# Altium PCB FPGA_board — kopia.PcbDoc (part 2 of 2)
Units mm, origin at the board's own origin, x right, y up, seen from the top; angles counter-clockwise.
Board outline 100 x 100 mm, 2 copper layers (Top Layer, Bottom Layer); 241 components, 219 nets, 1214 pads, 210 vias.
Unrouted connection lines stored in the file: 566.
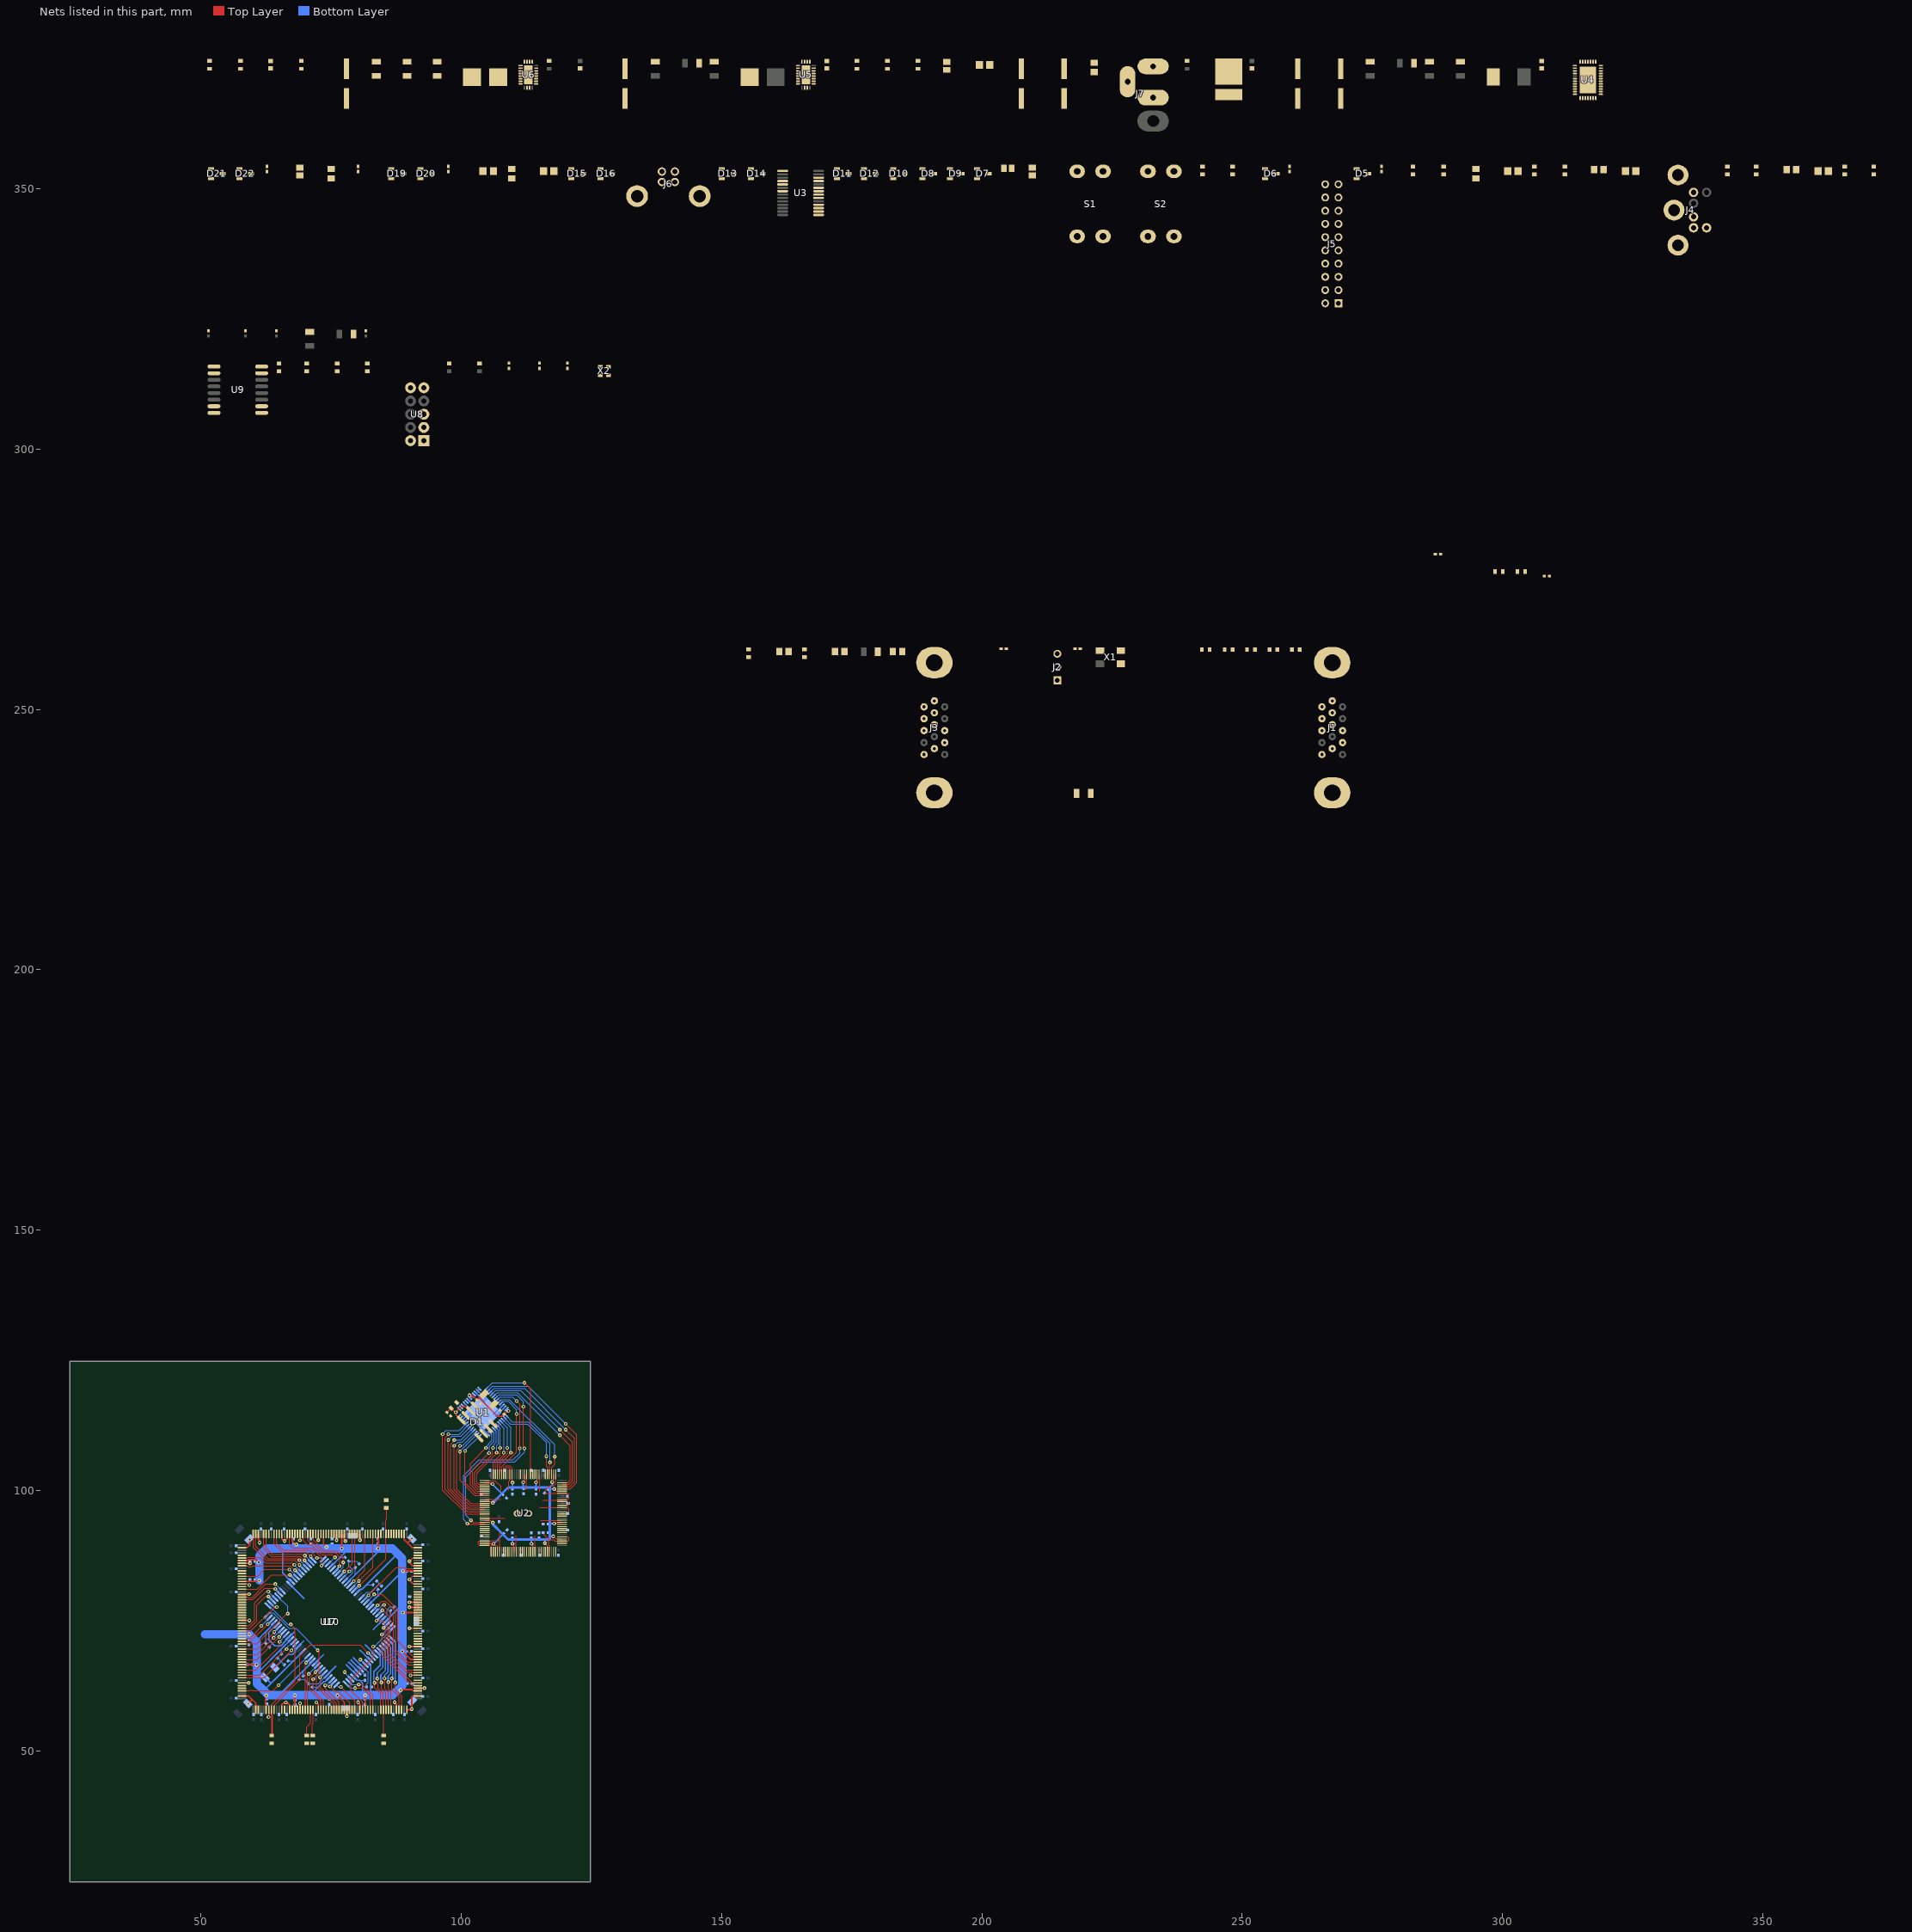
[diagram p2: the nets of this part, all layers, seen from the top]

## Via types
v1: diameter 0.71, hole 0.3, Top Layer to Bottom Layer, 208 vias
v2: diameter 1.27, hole 0.711, Top Layer to Bottom Layer, 2 vias

## Nets (pads, with @x,y where several pads share a name; then routed paths per layer and width w, separated by ;. In a path a pad name is that pad's centre, name@x,y a point inside that pad or via, vN(x,y) a via of type N, cw(c..) or ccw(c..) an arc to the next point about the centre after c; other vN are vias at no path point) (continued)
3.3V: C1.1 C2.2 C3.2 C6.2 C7.1 C8.1 C11.1 C12.1 C13.1 C14.1 C15.1 C16.1 C17.1 C18.1 C19.1 C20.1 C21.1 C65.1 C66.1 C67.1 C68.2 C69.2 C70.2 C71.2 C72.1 C73.1 C74.1 C75.1 C76.1 C77.1 C78.1 C79.1 C80.1 C81.1 C82.1 C83.1 C84.1 C85.1 C88.1 C94.1 C98.1 C102.1 C106.1 C107.1 C108.1 C111.1 C114.1 C117.1 C120.1 C123.1 C126.1 C129.1 C132.1 C135.1 C137.1 C139.1 D5.2 D6.2 D8.2 D9.2 D11.2 D12.2 D13.2 D14.2 D15.2 D16.2 D19.2 D20.2 D21.2 D22.2 J2.3 J5.7 J5.8 J5.9 L3.2 R1.2 R7.1 R25.1 R26.1 R36.1 R41.1 R42.1 R43.1 R44.1 R45.1 U1.13 U1.29 U1.30 U2.4 U2.12 U2.16 U2.27 U2.34 U2.42 U2.48 U2.54 U2.58 U2.66 U2.75 U2.84 U2.95 U2.97 U2.100 U2.108 U2.117 U2.124 U7.7 U7.15 U7.35 U7.47 U7.66 U7.77 U7.96 U7.104 U7.124 U7.136 U7.154 U7.170 U7.192 U7.206 U7.213 U7.225 U9.1 U9.2 U9.9 U10.4 U10.11 U10.15 U10.20 U10.27 U10.41 U10.54 U10.61 U10.65 U10.70 U10.77 U10.91 U10.97 X1.4 X2.1 X2.4 | length 364.7
  Top Layer w0.2: U7.35@57.9,72.55 59.3,72.55 59.303,72.547 v1(59.303,72.379) ; v1@62.55,60.65 v1(62.575,60.65) ; U2.95@104.507,89.894 105.562,89.894 105.953,89.503 ; U2.84@104.507,94.294 105.605,94.294 v1(106.062,93.837) ; U2.75@104.507,97.894 105.805,97.894 v1(106.062,97.637) ; U2.66@104.507,101.494 105.757,101.494 v1(106.012,101.239) ; U2.97@105.757,88.244 105.757,89.289 106.212,89.744 v1(106.212,89.762) ; v1@106.212,89.494 106.752,89.494 106.957,89.289 U2.100@106.957,88.244 ; U2.58@108.157,103.144 108.157,104.355 108.596,104.794 109.317,104.794 109.757,104.355 U2.54@109.757,103.144 v1@109.757,101.649 ; v1(109.887,89.787) 109.887,89.559 110.157,89.289 U2.108@110.157,88.244 ; v1(111.887,101.587) 112.157,101.857 U2.48@112.157,103.144 v1@112.157,101.649 ; v1(113.487,89.787) 113.757,89.517 U2.117@113.757,88.244 ; v1(114.387,101.562) 114.557,101.732 U2.42@114.557,103.144 ; v1(116.056,89.894) 116.056,89.79 116.557,89.289 ; v1(117.672,91.194) 118.172,90.694 U2.4@119.407,90.694 ; v1@117.757,101.649 U2.34@117.757,103.144 ; v1(117.862,93.637) 118.119,93.894 U2.12@119.407,93.894 ; v1(117.862,100.312) 118.28,99.894 U2.27@119.407,99.894 ; 116.557,89.289 U2.124@116.557,88.244 116.557,89.289
  Top Layer w0.3: U7.47@57.9,66.55 v1(60.691,66.55) ; U7.15@57.9,82.55 58.868,82.55 58.877,82.559 59.595,82.559 59.604,82.55 61.05,82.55 v1(61.225,82.725) ; U7.7@57.9,86.55 58.978,86.55 59.158,86.73 60.595,86.73 v1(61.1,86.225) ; U7.66@62.55,57.9 62.55,58.826 62.398,58.978 62.398,60.473 v1(62.575,60.65) ; U7.225@67.55,91.7 67.55,90.275 68.171,89.654 v1(68.328,89.654) ; U7.77@68.05,57.9 v1(68.05,60.666) ; U7.213@73.55,91.7 73.55,89.725 v1(74.125,89.15) ; v1(76.225,60.65) 77.55,59.325 U7.96@77.55,58.7 ; U7.206@77.05,91.7 77.05,91.022 77.05,88.875 v1(77.066,88.859) ; U7.104@81.55,57.9 v1(81.55,60.666) ; v1(84.05,88.859) U7.192@84.05,91.7 ; v1(88.35,61.65) 88.5,61.8 90.5,61.8 90.75,61.55 U7.124@91.7,61.55 ; v1(88.7,69.125) 90.275,67.55 U7.136@91.7,67.55 ; v1(88.8,76.55) U7.154@91.7,76.55 ; v1(88.822,84.553) 88.825,84.55 U7.170@91.7,84.55 ; v1(101.571,118.272) 102.066,118.272 C2.2@102.985,117.353 103.41,117.777 ; C1.1@104.4,118.484 104.117,118.484 103.41,117.777 ; v1(109.066,115.267) 108.819,115.267 C3.2@108.218,114.666 107.794,114.242 106.945,114.242 103.41,117.777
  Bottom Layer w0.2: v1@61.05,82.55 v1(61.225,82.725) ; v1@61.15,86.55 v1@61.225,86.475 ; C82.1@62.446,70.654 62.446,72.876 62.47,72.9 ; C81.1@65.454,68.554 65.454,69.549 ; C80.1@66.754,67.254 67.733,67.254 67.78,67.3 ; C79.1@69.654,64.404 69.654,65.406 ; C78.1@71.404,62.196 72.475,62.196 ; 76.725,87.154 C83.1@77.696,87.154 ; 79.696,83.891 C84.1@79.696,85.196 ; 80.522,63.55 C76.1@81.55,63.55 ; 81.796,81.896 C85.1@83.071,81.896 ; C74.1@83.996,80.946 83.996,79.854 84.049,79.801 ; 86.3,75.709 86.446,75.855 C75.1@86.446,76.946 ; v1(106.212,89.762) v1@106.212,89.838 ; v1@114.123,101.562 v1(114.387,101.562)
  Bottom Layer w0.3: 60.75,64.475 60.75,64.944 60.848,64.944 61.152,65.248 ; 60.75,65.9 60.75,65.65 61.152,65.248 ; 60.75,70.931 60.75,71.18 62.446,72.876 ; v1(61.1,86.225) v1@61.125,86.225 ; 61.95,61.47 63.44,62.96 ; 62.47,72.9 64.1,74.529 U10.27@64.1,74.651 ; 62.634,88.859 62.841,88.859 ; 64.947,60.7 69.654,65.406 71.454,67.207 U10.11@71.454,67.297 ; 65.7,88.859 65.7,84.185 67.385,82.5 U10.41@67.494,82.5 ; U10.20@67.239,71.434 U10.20@67.317,71.434 67.317,71.413 65.454,69.549 61.152,65.248 ; 67.733,67.254 63.44,62.96 ; 67.78,67.3 U10.15@69.615,69.136 ; v1@68.203,89.704 68.203,89.654 v1@68.35,89.508 ; v1(68.328,89.654) 68.35,89.633 v1@68.35,89.508 ; v1@68.35,89.5 v1@68.35,89.508 ; 71.65,60.7 71.65,61.371 72.475,62.196 73.327,63.048 73.361,63.048 73.621,63.308 73.899,63.308 U10.4@74.671,64.08 ; v1(74.125,89.15) v1@74.15,89.15 ; U10.54@74.883,85.434 75.006,85.434 76.725,87.154 78.075,88.504 78.075,88.859 ; v1(77.066,88.859) v1@77.1,88.859 ; U10.61@78.101,82.217 78.101,82.295 79.696,83.891 84.05,88.244 v1(84.05,88.859) v1@84.05,88.934 ; U10.97@79.303,64.257 80.009,63.55 80.522,63.55 81.075,62.997 81.075,60.7 ; U10.65@79.939,80.379 80.56,80.999 80.899,80.999 81.796,81.896 87.512,87.612 87.512,88.137 ; U10.91@82.06,67.014 82.06,66.887 82.639,66.308 82.639,60.986 82.925,60.7 ; U10.70@82.237,78.08 82.328,78.08 84.049,79.801 88.684,84.437 v1@88.8,84.553 ; U10.77@85.454,74.863 86.3,75.709 ; 86.446,75.855 88.684,78.093 88.8,78.209 ; v1@88.67,84.553 v1@88.8,84.553 ; v1(88.7,69.125) v1@88.7,69.475 ; v1@88.775,76.575 v1(88.8,76.55) ; v1@88.8,84.8 v1@88.8,84.553 ; v1(88.822,84.553) v1@88.8,84.553 ; v1(101.571,118.272) 101.907,117.936 ; U1.30@101.73,117.76 101.907,117.936 ; U1.29@102.084,118.113 101.907,117.936 ; v1(106.012,101.239) 107.756,99.495 C18.1@107.756,99.344 ; v1(106.212,89.762) 108.006,91.556 C19.1@108.006,91.594 ; U1.13@108.695,115.638 v1(109.066,115.267) ; v1(109.887,89.787) 109.887,90.594 ; 109.887,100.594 v1(109.887,101.512) ; C16.1@111.887,100.594 v1(111.887,101.587) ; v1(113.487,89.787) 113.487,90.594 ; 114.387,100.594 v1(114.387,101.562) ; 116.006,90.594 116.056,90.544 v1(116.056,89.894) ; 117.006,91.227 117.039,91.194 v1(117.672,91.194) ; C13.1@117.006,93.637 v1(117.862,93.637) ; v1(117.487,101.637) 117.487,101.075 117.006,100.594 117.287,100.312 v1(117.862,100.312) ; 61.152,65.248 C73.1@62.3,64.1 63.44,62.96
  Bottom Layer w0.4: 67.45,88.859 67.55,88.959 ; 73.475,88.859 73.55,88.934
  Bottom Layer w0.5: v1(106.062,93.837) 106.062,93.538 108.006,91.594 109.006,90.594 109.887,90.594 113.487,90.594 116.006,90.594 117.006,90.594 117.006,91.227 C13.1@117.006,93.637 ; v1(106.062,97.637) 106.062,97.649 107.756,99.344 109.006,100.594 109.887,100.594 111.887,100.594 114.387,100.594 117.006,100.594 C13.1@117.006,93.637 ; 117.006,92.594 C13.1@117.006,93.637
  Bottom Layer w1.6: 50.804,72.379 v1(59.303,72.379) 60.75,70.931 60.75,65.9 ; 60.75,64.475 60.75,62.95 62.09,61.61 62.812,60.888 63,60.7 64.947,60.7 71.65,60.7 81.075,60.7 82.925,60.7 82.93,60.705 86.822,60.705 88.684,62.567 88.684,78.093 88.684,84.437 88.684,84.539 88.67,84.553 88.67,86.98 87.512,88.137 86.791,88.859 v1(84.05,88.859) 78.075,88.859 v1@77.1,88.859 ; 60.75,64.944 60.75,65.65 ; v1(61.225,82.725) 61.225,86.475 61.225,87.45 62.634,88.859 ; 62.841,88.859 65.7,88.859 67.45,88.859 73.475,88.859 v1(77.066,88.859)
3.3V_USB: C46.1 R27.2 R28.2 U3.4 U3.17
5V: C39.2 J4.4 R14.2 R15.2
5V_IN: C48.1 C49.1 C55.1 C56.1 C59.1 C64.1 D23.2 R30.1 U4.3 U4.4 U4.9 U4.10 U4.22 U4.23 U4.24 U4.27 U4.28 U4.29 U4.35 U5.2 U5.4 U5.10 U5.11 U5.17 U5.18 U5.19 U5.23 U5.24 U6.2 U6.4 U6.10 U6.11 U6.17 U6.18 U6.19 U6.23 U6.24
5V_USB: C44.1 C45.2 D7.2 D10.2 J5.10 J6.1 U3.20
10MHZ: U2.15 X1.3
50MHZ: U7.31 U7.152 X2.3
BTN1: C42.2 R26.2 S2.2 U7.44
BTN2: C41.2 R25.2 S1.2 U7.46
FB_BLANK: U1.11 U2.37 | length 16.2
  Top Layer w0.2: v1(116.356,106.594) 116.356,104.694 116.557,104.494 U2.37@116.557,103.144
  Bottom Layer w0.2: U1.11@108.342,113.977 108.342,113.906 109.454,112.794 112.79,112.794 116.356,109.228 v1(116.356,106.594)
FB_CLK: U1.24 U2.45 | length 25.9
  Top Layer w0.2: v1(112.156,120.694) 113.357,119.493 U2.45@113.357,103.144
  Bottom Layer w0.2: U1.24@104.806,119.527 105.972,120.694 v1(112.156,120.694)
FB_D0: U1.41 U2.81 | length 26.2
  Top Layer w0.2: v1(96.436,110.814) 96.436,100.085 101.027,95.494 U2.81@104.507,95.494
  Bottom Layer w0.2: v1(96.436,110.814) 97.116,111.494 99.601,111.494 U1.41@101.023,112.916
FB_D1: U1.42 U2.80 | length 24.8
  Top Layer w0.2: v1(97.546,110.814) 96.891,110.159 96.891,100.196 101.193,95.894 U2.80@104.507,95.894
  Bottom Layer w0.2: v1(97.546,110.814) 99.628,110.814 U1.42@101.377,112.562
FB_D2: U1.43 U2.79 | length 23.4
  Top Layer w0.2: v1(97.546,109.704) 97.456,109.614 97.456,100.197 101.359,96.294 U2.79@104.507,96.294
  Bottom Layer w0.2: v1(97.546,109.704) 98.256,110.414 99.935,110.414 U1.43@101.73,112.209
FB_D3: U1.44 U2.78 | length 22
  Top Layer w0.2: v1(98.656,109.704) 98.656,109.52 98.001,108.865 98.001,100.217 101.524,96.694 U2.78@104.507,96.694
  Bottom Layer w0.2: v1(98.656,109.704) 99.932,109.704 U1.44@102.084,111.855
FB_D4: U1.45 U2.77 | length 20.6
  Top Layer w0.2: v1(98.656,108.594) 98.656,100.128 101.69,97.094 U2.77@104.507,97.094
  Bottom Layer w0.2: v1(98.656,108.594) 99.366,109.304 100.239,109.304 U1.45@102.437,111.502
FB_D5: U1.46 U2.76 | length 19.2
  Top Layer w0.2: v1(99.766,108.594) 99.766,108.41 99.111,107.755 99.111,100.239 101.856,97.494 U2.76@104.507,97.494
  Bottom Layer w0.2: v1(99.766,108.594) 100.236,108.594 U1.46@102.791,111.148
FB_D6: U1.47 U2.72 | length 16.2
  Top Layer w0.2: v1(99.766,107.484) 99.766,101.961 102.633,99.094 U2.72@104.507,99.094
  Bottom Layer w0.2: v1(99.766,107.484) 99.766,107.55 102.605,110.389 102.738,110.389 U1.47@103.144,110.795
FB_D7: U1.48 U2.71 | length 14.8
  Top Layer w0.2: v1(100.747,107.604) 100.747,101.546 102.799,99.494 U2.71@104.507,99.494 U2.71@104.656,99.494
  Bottom Layer w0.2: v1(100.747,107.604) 100.747,107.69 U1.48@103.498,110.441
FB_D8: U1.3 U2.70 | length 15.2
  Top Layer w0.2: U2.70@104.507,99.894 102.965,99.894 101.756,101.103 101.756,105.194 v1(104.756,108.194)
  Bottom Layer w0.2: v1(104.756,108.194) 104.756,108.425 105.919,109.588 105.919,110.671 105.513,111.077 U1.3@105.513,111.148
FB_D9: U1.4 U2.69 | length 15
  Top Layer w0.2: U2.69@104.507,100.294 103.922,100.294 103.13,100.294 102.156,101.268 102.156,103.994 v1(105.356,107.194)
  Bottom Layer w0.2: v1(105.356,107.194) 105.411,107.249 105.411,108.514 106.319,109.423 106.319,111.049 U1.4@105.867,111.502 U1.4@105.867,111.431
FB_D10: U1.5 U2.68 | length 13.9
  Top Layer w0.2: U2.68@103.756,100.694 103.296,100.694 102.556,101.434 102.556,103.467 106.011,106.922 106.011,108.082 v1(106.123,108.194)
  Bottom Layer w0.2: v1(106.123,108.194) 106.123,108.66 106.719,109.257 106.719,111.286 106.22,111.785 U1.5@106.22,111.855
FB_D11: U1.6 U2.67 | length 14.3
  Top Layer w0.2: U2.67@104.507,101.094 103.462,101.094 102.956,101.6 102.956,103.302 106.824,107.17 v1(106.824,107.284)
  Bottom Layer w0.2: U1.6@106.574,112.209 106.574,112.138 107.119,111.593 107.119,108.957 106.824,108.662 v1(106.824,107.284)
FB_D12: U1.7 U2.63 | length 10.2
  Top Layer w0.2: U2.63@106.157,103.144 106.157,103.494 106.157,105.463 107.489,106.795 v1(107.489,108.194)
  Bottom Layer w0.2: U1.7@106.927,112.562 107.519,111.971 107.519,108.224 v1(107.489,108.194)
FB_D13: U1.8 U2.62 | length 10.8
  Top Layer w0.2: U2.62@106.557,103.144 106.557,105.297 108.183,106.923 v1(108.183,107.284)
  Bottom Layer w0.2: U1.8@107.281,112.916 107.281,112.845 108.183,111.944 v1(108.183,107.284)
FB_D14: U1.9 U2.61 | length 11.4
  Top Layer w0.2: U2.61@106.957,103.144 106.957,105.131 108.856,107.031 v1(108.856,108.194)
  Bottom Layer w0.2: U1.9@107.635,113.27 108.856,112.048 v1(108.856,108.194)
FB_D15: U1.10 U2.60 | length 12
  Top Layer w0.2: U2.60@107.357,103.144 107.357,104.966 109.541,107.15 v1(109.541,107.284)
  Bottom Layer w0.2: U1.10@107.988,113.623 109.541,112.07 v1(109.541,107.284)
FB_D16: U1.16 U2.59 | length 16.9
  Top Layer w0.2: U2.59@107.757,103.694 107.757,104.52 110.656,107.419 110.656,107.762 110.596,107.822 110.596,114.634 v1(110.656,114.694)
  Bottom Layer w0.2: U1.16@107.635,116.699 107.705,116.699 108.111,117.105 109.045,117.105 110.656,115.494 v1(110.656,114.694)
FB_D17: U1.17 U2.35 | length 20.4
  Top Layer w0.2: U2.35@117.357,103.144 117.357,104.394 117.957,104.994 v1(117.957,106.494)
  Bottom Layer w0.2: U1.17@107.281,117.053 107.352,117.053 107.804,117.505 109.245,117.505 117.957,108.793 v1(117.957,106.494)
FB_D18: U1.18 U2.86 | length 40.1
  Top Layer w0.2: v1(101.213,93.65) 101.369,93.494 U2.86@104.507,93.494 ; v1(110.656,117.194) 111.301,116.549 111.301,115.322 111.311,115.312 111.311,108.154 v1(111.251,108.094)
  Bottom Layer w0.2: v1(101.213,93.65) 100.456,94.407 100.456,102.894 103.456,105.894 109.956,105.894 111.251,107.189 v1(111.251,108.094) ; U1.18@106.927,117.406 107.515,117.994 109.856,117.994 v1(110.656,117.194)
FB_D19: U1.19 U2.85 | length 40.8
  Top Layer w0.2: v1(101.856,94.294) 102.256,93.894 U2.85@104.507,93.894 ; v1(111.956,116.094) 111.956,108.299 v1(112.161,108.094)
  Bottom Layer w0.2: v1(101.856,94.294) 100.856,95.294 100.856,102.586 103.763,105.494 110.263,105.494 112.161,107.391 v1(112.161,108.094) ; U1.19@106.574,117.76 107.208,118.394 110.59,118.394 111.956,117.028 v1(111.956,116.094)
FB_D20: U1.20 U2.31 | length 27.6
  Top Layer w0.2: v1(118.956,110.594) 120.956,108.594 120.956,101.998 120.452,101.494 U2.31@119.407,101.494
  Bottom Layer w0.2: U1.20@106.22,118.113 106.901,118.794 110.756,118.794 v1(118.956,110.594)
FB_D21: U1.21 U2.30 | length 29.6
  Top Layer w0.2: v1(118.956,111.704) 121.356,109.304 121.356,101.832 120.617,101.094 U2.30@119.407,101.094
  Bottom Layer w0.2: U1.21@105.867,118.467 106.594,119.194 111.466,119.194 v1(118.956,111.704)
FB_D22: U1.22 U2.29 | length 31.6
  Top Layer w0.2: U2.29@119.407,100.694 120.783,100.694 121.756,101.667 121.756,110.014 v1(120.066,111.704)
  Bottom Layer w0.2: U1.22@105.513,118.82 106.287,119.594 112.176,119.594 v1(120.066,111.704)
FB_D23: U1.23 U2.28 | length 33.5
  Top Layer w0.2: U2.28@119.556,100.294 120.949,100.294 122.156,101.501 122.156,110.724 v1(120.066,112.814)
  Bottom Layer w0.2: U1.23@105.16,119.174 105.98,119.994 112.886,119.994 v1(120.066,112.814)
FB_INT_SEL: J2.2 U2.128
FB_SYNC: U1.12 U2.36 | length 16.5
  Top Layer w0.2: U2.36@116.957,103.144 116.957,105.289 v1(117.061,105.394)
  Bottom Layer w0.2: U1.12@108.695,114.33 109.832,113.194 112.956,113.194 117.061,109.089 v1(117.061,105.394)
GND: C1.2 C2.1 C3.1 C4.2 C5.1 C7.2 C8.2 C9.1 C10.2 C11.2 C12.2 C13.2 C14.2 C15.2 C16.2 C17.2 C18.2 C19.2 C20.2 C21.2 C22.2 C23.2 C24.2 C25.2 C26.2 C27.2 C28.2 C29.2 C30.2 C31.2 C32.2 C33.2 C34.2 C35.2 C36.2 C37.2 C38.2 C39.1 C40.1 C41.1 C42.1 C43.1 C44.2 C45.1 C46.2 C47.2 C48.2 C49.2 C50.2 C51.2 C52.2 C53.2 C55.2 C56.2 C57.1 C58.1 C59.2 C60.2 C61.2 C62.2 C64.2 C65.2 C66.2 C67.2 C69.1 C70.1 C71.1 C72.2 C73.2 C74.2 C75.2 C76.2 C77.2 C78.2 C79.2 C80.2 C81.2 C82.2 C83.2 C84.2 C85.2 C86.2 C87.2 C88.2 C89.2 C90.2 C91.2 C92.2 C93.2 C94.2 C95.2 C96.2 C97.2 C98.2 C99.2 C100.2 C101.2 C102.2 C103.2 C104.2 C105.2 C106.2 C107.2 C108.2 C109.2 C110.2 C111.2 C112.2 C113.2 C114.2 C115.2 C116.2 C117.2 C118.2 C119.2 C120.2 C121.2 C122.2 C123.2 C124.2 C125.2 C126.2 C127.2 C128.2 C129.2 C130.2 C131.2 C132.2 C133.2 C134.2 C135.2 C136.2 C137.2 C138.2 C139.2 C140.2 C141.2 C142.2 C143.2 C144.2 C145.2 D1.1 D1.2 D1.3 D1.4 D1.5 D1.7 D2.2 D3.2 D4.2 D5.1 D6.1 D7.1 D8.1 D9.1 D10.1 D11.1 D12.1 D13.1 D14.1 D15.1 D16.1 D19.1 D20.1 D21.1 D22.1 D24.2 J1.5 J1.6 J1.7 J1.8 J1.10 J2.1 J3.5 J3.6 J3.7 J3.8 J3.10 J4.3 J5.17 J5.18 J5.19 J5.20 J6.4 J7.2 J7.3 R4.1 R5.2 R6.2 R8.1 R31.2 R33.2 R35.2 R37.2 R40.1 R46.2 R47.2 R48.2 S1.1 S2.1 U1.1 U1.2 U1.14 U1.15 U1.25 U1.26 U1.27 U1.31 U1.33 U1.39 U1.40 U1.49 U2.2 U2.3 U2.5 U2.13 U2.17 U2.19 U2.20 U2.22 U2.23 U2.26 U2.33 U2.41 U2.47 U2.55 U2.57 U2.65 U2.74 U2.83 U2.94 U2.96 U2.101 U2.109 U2.118 U2.125 U3.7 U3.18 U3.21 U3.25 U3.26 U4.8 U4.13 U4.14 U4.15 U4.17 U4.18 U4.19 U4.32 U4.33 U4.34 U4.36 U4.37 U4.38 U4.39 U5.1 U5.3 U5.21 U5.25 U6.1 U6.3 U6.21 U6.25 U7.2 U7.5 U7.8 U7.11 U7.16 U7.20 U7.30 U7.36 U7.42 U7.48 U7.54 U7.59 U7.62 U7.67 U7.72 U7.75 U7.79 U7.86 U7.97 U7.102 U7.105 U7.116 U7.120 U7.122 U7.125 U7.130 U7.138 U7.141 U7.148 U7.155 U7.156 U7.157 U7.158 U7.165 U7.168 U7.172 U7.175 U7.179 U7.182 U7.191 U7.193 U7.199 U7.205 U7.208 U7.215 U7.222 U7.227 U7.229 U7.234 U7.238 U8.2 U8.10 U9.10 U10.5 U10.10 U10.17 U10.21 U10.26 U10.40 U10.55 U10.60 U10.67 U10.71 U10.76 U10.88 U10.90 U10.93 U10.94 U10.95 U10.96 X1.2 X2.2 | length 250.6
  Top Layer w0.2: U7.179@91.65,89 U7.179@91.7,89.05 ; U2.96@104.507,89.494 103.462,89.494 103.257,89.699 103.257,90.089 103.462,90.294 U2.94@104.507,90.294 105.818,90.294 105.94,90.417 107.305,90.417 107.357,90.469 ; U2.83@104.507,94.694 108.381,94.694 ; U2.74@104.507,98.294 107.656,98.294 ; U2.65@104.507,101.894 105.952,101.894 105.962,101.894 106.506,101.894 107.606,100.794 107.606,99.994 ; U2.101@107.357,88.244 107.357,89.294 ; 107.357,89.543 107.357,89.294 ; 107.357,91.994 107.357,90.469 ; U2.57@108.557,103.719 108.557,104.189 108.762,104.394 109.152,104.394 109.357,104.189 U2.55@109.357,103.144 109.357,101.933 109.157,101.733 109.157,100.019 ; U2.109@110.557,88.244 110.557,91.394 ; 112.557,100.244 U2.47@112.557,103.144 ; U2.118@114.157,88.244 114.157,91.319 ; U2.41@114.957,103.144 114.957,102.696 114.957,101.933 115.067,101.823 115.067,101.233 115.054,101.22 115.054,99.82 ; 115.096,96.784 119.317,96.784 U2.19@119.407,96.694 ; 115.231,94.294 U2.13@119.407,94.294 ; 115.656,98.119 119.407,98.119 ; 115.706,91.744 117.001,90.449 ; 116.031,99.869 117.145,100.982 117.85,100.982 118.157,101.289 U2.33@118.157,103.144 ; 116.106,99.494 U2.26@119.407,99.494 120.452,99.494 120.657,99.289 120.657,98.499 120.452,98.294 U2.23@119.407,98.294 119.407,98.119 ; U2.125@116.957,88.244 116.957,89.455 116.832,89.579 116.832,90.28 117.001,90.449 ; U2.2@119.407,89.894 U2.3@119.407,90.294 ; U2.5@119.407,91.094 120.452,91.094 120.657,90.889 120.657,90.419 120.531,90.294 U2.3@119.407,90.294 ; U2.17@119.407,95.894 120.452,95.894 120.657,96.099 120.657,96.489 120.452,96.694 U2.19@119.407,96.694 ; 107.357,89.294 107.357,90.469 ; 117.001,90.449 117.069,90.517 117.784,90.517 118.006,90.294 U2.3@119.407,90.294 ; U2.19@119.407,96.694 U2.20@119.407,97.094 120.452,97.094 120.657,97.299 120.657,97.693 120.456,97.894 U2.22@119.407,97.894 119.407,98.119
  Top Layer w0.3: U7.59@57.9,60.55 59.15,60.55 59.85,59.85 ; U7.54@57.9,63.05 v1(59.175,63.05) ; U7.30@57.9,75.05 v1(59.3,75.05) ; U7.20@57.9,80.05 59.2,80.05 v1(59.25,80.1) ; U7.16@57.9,82.05 59.075,82.05 59.271,81.854 v1(59.303,81.854) ; U7.8@57.9,86.05 59.425,86.05 v1(59.45,86.025) ; U7.2@57.9,89.05 58.85,89.05 59.4,89.6 v1(59.4,90.6) ; v1(59.1,59.1) 59.85,59.85 ; U7.62@60.55,57.9 60.55,59.15 59.85,59.85 ; U7.238@61.05,91.7 61.05,90.55 v1@61.3,90.3 ; v1(63,56.5) 63.05,56.55 U7.67@63.05,57.9 ; U7.72@65.55,57.9 65.55,58.9 65.775,59.125 v1@66.3,59.125 ; U7.229@65.55,91.7 65.55,90.725 65.75,90.525 v1@66.026,90.525 ; v1(66.078,90.304) 66.078,90.472 v1@66.026,90.525 ; v1(66.328,59.303) 66.328,59.153 v1@66.3,59.125 ; U7.227@66.55,91.7 66.55,90.774 66.301,90.525 v1@66.026,90.525 ; U7.75@67.05,57.9 67.05,58.826 66.751,59.125 v1@66.3,59.125 ; v1(69.003,90.429) 69.05,90.476 U7.222@69.05,91.7 ; U7.79@69.05,57.9 v1(69.05,59.15) ; v1(72.175,59.3) 72.55,58.925 U7.86@72.55,57.9 ; v1(72.55,90.484) U7.215@72.55,91.7 ; v1(76.05,90.484) U7.208@76.05,91.7 ; U7.205@77.55,91.7 77.55,90.675 77.755,90.47 v1(77.755,90.32) ; v1(78.05,56.684) U7.97@78.05,57.9 ; v1(80.2,59.325) 80.55,58.975 U7.102@80.55,57.9 ; v1(80.55,90.484) U7.199@80.55,91.7 ; v1(87.2,59.35) 87.55,59 U7.116@87.55,57.9 ; U7.182@89.05,91.7 89.05,90.547 89.697,89.9 ; U7.120@89.55,57.9 90.4,57.9 v1(90.525,58.025) 90.525,60.301 90.75,60.526 90.75,60.55 U7.122@91.7,60.55 ; v1@89.975,82.849 90.774,82.05 U7.165@91.7,82.05 ; v1(90.05,78.55) U7.158@91.7,78.55 U7.157@91.7,78.05 U7.156@91.7,77.55 ; v1@90.054,77.55 U7.156@91.7,77.55 ; v1(90.054,82.929) 90.675,83.55 U7.168@91.7,83.55 ; v1(90.275,64.5) 90.325,64.55 U7.130@91.7,64.55 ; 90.45,70.05 U7.141@91.7,70.05 ; 90.45,73.55 U7.148@91.7,73.55 ; v1(90.5,90.8) 89.697,89.997 89.697,89.9 ; U7.179@91.65,89.05 90.774,89.05 ; U7.125@91.7,62.05 v1(92.95,62.05) ; U7.155@91.7,77.05 U7.156@91.7,77.55 ; U7.172@91.7,85.55 90.699,85.55 90.054,86.195 v1(90.054,86.429) 90.104,86.429 90.725,87.05 U7.175@91.7,87.05 ; U7.179@91.7,89.05 90.774,89.05 ; 89.697,89.9 90.547,89.05 90.774,89.05
  Bottom Layer w0.2: C82.2@63.154,69.946 63.75,70.543 63.75,70.65 ; C81.2@64.746,67.846 65.396,67.196 65.4,67.193 ; C80.2@66.046,66.546 65.4,67.193 ; 66.707,68.5 65.4,67.193 ; C79.2@68.946,63.696 69.904,63.696 C78.2@70.696,62.904 72.546,62.904 73.14,63.498 73.175,63.498 74.212,64.535 U10.5@74.212,64.539 ; U10.60@77.641,82.677 77.648,82.677 79.175,84.204 79.175,84.746 78.404,85.518 C83.2@78.404,86.446 79.861,86.446 C84.2@80.404,85.904 ; 80.222,64.878 U10.95@80.222,65.176 ; U10.94@80.682,65.635 80.682,65.418 C76.2@81.55,64.55 ; U10.67@80.858,79.459 80.858,79.466 81.897,80.505 82.605,80.505 84.241,82.141 ; U10.93@81.141,66.095 82.1,65.136 82.1,63.126 81.8,62.826 C77.2@81.8,62.3 ; C85.2@83.779,82.604 84.241,82.141 ; C74.2@84.704,81.654 84.704,81.679 84.241,82.141 ; U10.76@84.995,75.323 85.758,76.085 85.758,77.035 86.358,77.635 87.135,77.635 C75.2@87.154,77.654
  Bottom Layer w0.203: U10.93@81.063,66.095 U10.93@81.141,66.095 ; U10.90@82.442,67.474 U10.90@82.52,67.474 ; U10.88@83.439,68.393 U10.88@83.439,68.471 ; U10.76@84.995,75.195 U10.76@84.995,75.323
  Bottom Layer w0.3: C73.2@64.209,66.009 65.396,67.196 66.7,68.5 66.707,68.5 67.597,68.5 68.117,69.02 68.117,69.476 U10.17@68.696,70.055 69.75,71.109 ; U10.26@64.559,74.191 64.469,74.191 63.811,73.534 63.05,72.772 63.05,71.35 63.75,70.65 64.225,70.175 65.372,70.175 65.855,70.658 65.855,70.763 U10.21@66.858,71.766 ; v1@66.05,90.333 v1(66.078,90.304) ; U10.21@66.858,71.893 U10.21@66.858,71.766 ; U10.40@67.034,82.04 69.825,79.25 ; 67.925,72.833 U10.21@66.858,71.766 ; U10.10@71.913,66.837 73.55,68.474 ; v1(72.55,90.484) 72.575,90.509 v1@72.575,90.625 ; U10.5@74.212,64.539 75.925,66.253 ; v1(76.05,90.484) 76.05,90.65 v1@76.112,90.712 ; 77.928,66.55 U10.96@79.762,64.716 ; 78.388,67.01 U10.95@80.222,65.176 ; 78.848,67.469 U10.94@80.682,65.635 ; 79.23,67.929 U10.93@81.063,66.095 ; v1(80.55,90.484) 80.575,90.509 v1@80.575,90.575 ; 80.608,69.308 U10.90@82.442,67.474 ; 81.605,70.305 U10.88@83.439,68.471 ; 83.161,73.362 U10.76@84.995,75.195 ; U1.39@100.316,113.623 U1.49@102.031,115.338 ; U1.40@100.67,113.269 102.384,114.984 U1.33@100.67,116.699 ; U1.31@101.377,117.406 U1.49@103.091,115.691 ; U1.27@102.791,118.82 U1.49@104.506,117.106 ; U1.49@103.445,112.509 U1.2@105.16,110.795 U1.1@104.806,110.441 ; U1.25@103.498,119.527 U1.26@103.144,119.174 U1.49@104.859,117.459 ; U1.49@106.273,114.631 U1.15@107.988,116.345 ; U1.49@106.627,114.277 U1.14@108.342,115.992
  other v1: 90.054,70.05 90.054,73.55 90.054,77.575 61.3,90
  other v2: 110.756,95.594 113.006,95.594
GPIO0: D8.3 J5.1 U7.89
GPIO1: D11.3 J5.2 U7.90
GPIO2: D13.3 J5.3 U7.91
GPIO3: D15.3 J5.4 U7.203
GPIO4: D19.3 J5.5 U7.207
GPIO5: D21.3 J5.6 U7.210
GPIO6: D9.3 J5.11 U7.211
GPIO7: D12.3 J5.12 U7.212
GPIO8: D14.3 J5.13 U7.214
GPIO9: D16.3 J5.14 U7.216
GPIO10: D20.3 J5.15 U7.218
GPIO11: D22.3 J5.16 U7.223
LED1: R16.2 U7.50
LED2: R19.2 U7.55
LED3: R22.2 U7.56
NetC4_1: C4.1 D1.6 D1.8 R1.1 U1.36 | length 8.8
  Top Layer w0.254: C4.1@97.258,115.02 R1.1@98.071,115.833 98.884,115.02 v1(98.955,115.02) ; D1.8@100.012,113.531 98.955,114.588 v1(98.955,115.02) ; D1.6@101.808,115.327 101.055,116.08 100.015,116.08 v1(98.955,115.02)
  Bottom Layer w0.254: v1(98.955,115.02) 99.574,115.638 U1.36@99.609,115.638
NetC5_2: C5.2 J1.16 J1.17
NetC6_1: C6.1 U1.35
NetC9_2: C9.2 J3.16 J3.17
NetC40_2: C40.2 J4.7 J4.8 J4.9
NetC43_2: C43.2 J6.5 J6.6
NetC47_1: C47.1 U4.7
NetC54_1: C54.1 R29.2 R31.1 U4.25
NetC57_2: C57.2 U4.16
NetC58_2: C58.2 R32.2
NetC63_1: C63.1 R34.2 R35.1 U5.22
NetC68_1: C68.1 R36.2 R37.1 U6.22
NetD2_1: D2.1 R16.1
NetD3_1: D3.1 R19.1
NetD4_1: D4.1 R22.1
NetD7_3: D7.3 J6.3 U3.15
NetD10_3: D10.3 J6.2 U3.16
NetD17_1: D17.1 R27.1
NetD17_2: D17.2 U3.23
NetD18_1: D18.1 R28.1
NetD18_2: D18.2 U3.22
NetD23_1: D23.1 J7.1
NetD24_1: D24.1 R30.2
NetJ1_13: J1.13 R2.1
NetJ1_14: J1.14 R3.1
NetJ3_1: J3.1 R9.1
NetJ3_2: J3.2 R10.1
NetJ3_3: J3.3 R11.1
NetJ3_13: J3.13 R12.1
NetJ3_14: J3.14 R13.1
NetJ4_1: J4.1 R18.1 R21.2
NetJ4_5: J4.5 R17.1 R24.2
NetL1_1: L1.1 U4.1 U4.2 U4.11 U4.12 U4.20 U4.21 U4.30 U4.31
NetL2_1: L2.1 U5.5 U5.6 U5.7 U5.8 U5.13 U5.14 U5.15 U5.16
NetL3_1: L3.1 U6.5 U6.6 U6.7 U6.8 U6.13 U6.14 U6.15 U6.16
NetR7_2: R7.2 U1.38
NetR8_2: R8.2 U1.37
NetR14_1: R14.1 R17.2
NetR15_1: R15.1 R18.2
NetR20_2: R20.2 R21.1
NetR23_2: R23.2 R24.1
NetR32_1: R32.1 U4.26
NetR33_1: R33.1 U4.6
NetR38_2: R38.2 U7.26 U8.9
NetR39_2: R39.2 U7.28 U8.5
NetR40_2: R40.2 U7.27 U8.1
NetR41_2: R41.2 U7.17
NetR42_2: R42.2 U7.153
NetR43_2: R43.2 U7.25
NetU7_12: U7.12 U9.15
NetU7_14: U7.14 U9.7
NetU7_23: U7.23 U9.16
NetU7_24: U7.24 U9.8
NetU7_29: U7.29 U8.3
PS2_CLK: D5.3 R23.1 U7.224
PS2_DATA: D6.3 R20.1 U7.230
SRAM_ADDR0: U7.21 U10.37 | length 9.5
  Top Layer w0.203: U7.21@57.9,79.55 58.872,79.55 58.978,79.443 59.824,79.443 62.416,82.036 v1(64.3,82.036)
  Bottom Layer w0.203: v1@64.281,82.036 v1(64.3,82.036) 64.3,82.028 65.656,80.673 U10.37@65.656,80.661
SRAM_ADDR1: U7.22 U10.36 | length 8.7
  Top Layer w0.203: U7.22@57.9,79.05 57.909,79.04 59.991,79.04 62.206,81.256 64.143,81.256 v1(64.3,81.1)
  Bottom Layer w0.203: v1(64.3,81.1) 64.307,81.1 64.403,81.004 64.403,80.995 U10.36@65.196,80.202
SRAM_ADDR2: U7.34 U10.32 | length 10.1
  Top Layer w0.203: U7.34@57.9,73.05 59.624,73.05 64.194,77.62 v1(64.565,77.62)
  Bottom Layer w0.203: U10.32@63.357,78.363 63.369,78.363 64.153,77.579 64.194,77.62 v1(64.565,77.62)
SRAM_ADDR3: U7.33 U10.33 | length 10.6
  Top Layer w0.203: U7.33@57.9,73.55 59.35,73.55 60.728,74.928 60.728,78.003 62.375,79.65 62.99,79.65 62.987,79.653 v1(62.978,79.653)
  Bottom Layer w0.203: v1(62.978,79.653) 62.987,79.653 U10.33@63.817,78.823
SRAM_ADDR4: U7.32 U10.34 | length 11.6
  Top Layer w0.203: U7.32@57.9,74.05 59.25,74.05 60.325,75.125 60.325,78.434 62.491,80.6 v1(62.959,80.6)
  Bottom Layer w0.203: v1(62.959,80.6) U10.34@64.277,79.283
SRAM_ADDR5: U7.39 U10.35 | length 15.4
  Top Layer w0.203: U7.39@57.9,70.55 60.76,70.55 66.56,76.35 v1(66.675,76.35)
  Bottom Layer w0.203: U10.35@64.736,79.742 64.736,79.697 66.675,77.758 v1(66.675,76.35)
SRAM_ADDR6: U7.18 U10.42 | length 11.5
  Top Layer w0.203: U7.18@57.9,81.05 60.86,81.05 63.593,83.782 67.1,83.782 v1(67.103,83.779)
  Bottom Layer w0.203: v1(67.103,83.779) 67.134,83.779 U10.42@67.954,82.96
SRAM_ADDR7: U7.13 U10.43 | length 11.7
  Top Layer w0.203: U7.13@57.9,83.55 60.875,83.55 62.157,84.832 67,84.832 66.978,84.811 v1(66.978,84.804)
  Bottom Layer w0.203: v1(66.978,84.804) 66.978,84.811 67,84.832 67,84.829 68.41,83.419 U10.43@68.413,83.419
SRAM_ADDR8: U7.9 U10.44 | length 11.8
  Top Layer w0.203: U7.9@57.9,85.55 58.997,85.55 59.178,85.368 59.722,85.368 59.903,85.55 67.204,85.55 68.075,84.679 v1(68.078,84.679)
  Bottom Layer w0.203: v1(68.078,84.679) 68.078,84.673 U10.44@68.873,83.879
SRAM_ADDR9: U7.6 U10.45 | length 12.8
  Top Layer w0.203: U7.6@57.9,87.05 58.839,87.05 58.996,87.206 61.324,87.206 62.41,86.12 67.613,86.12 67.978,85.754 v1(67.953,85.729)
  Bottom Layer w0.203: v1(67.953,85.729) 67.978,85.754 67.978,85.749 67.95,85.721 67.965,85.721 69.332,84.353 U10.45@69.332,84.338
SRAM_ADDR10: U7.240 U10.46 | length 14.4
  Top Layer w0.203: U7.240@60.05,91.7 60.056,91.694 60.056,89.128 60.05,89.122 60.05,89.05 62.543,86.557 68.104,86.557 68.272,86.389 68.272,86.357 68.656,85.973 68.688,85.973 68.953,85.708 v1(68.953,85.704) v1@69.025,85.776
  Bottom Layer w0.203: v1(68.953,85.704) 68.903,85.654 68.914,85.654 68.925,85.665 U10.46@69.792,84.798
SRAM_ADDR11: U7.239 U10.47 | length 13.9
  Top Layer w0.203: U7.239@60.55,91.7 60.55,90.705 60.496,90.651 60.496,89.329 62.865,86.96 68.64,86.96 68.95,86.65 v1(68.928,86.629)
  Bottom Layer w0.203: v1(68.928,86.629) 68.95,86.65 69.271,86.329 69.271,86.315 70.252,85.334 U10.47@70.252,85.258
SRAM_ADDR12: U7.236 U10.48 | length 13.1
  Top Layer w0.203: U7.236@62.05,91.7 62.05,88.83 63.517,87.363 69.123,87.363 69.642,86.844 69.684,86.844 69.928,86.601 v1(69.928,86.587) 69.928,86.501 v1@70.052,86.625
  Bottom Layer w0.203: v1(69.928,86.587) 69.928,86.501 U10.48@70.711,85.717
SRAM_ADDR13: U7.235 U10.49 | length 13.5
  Top Layer w0.203: U7.235@62.55,91.7 62.55,88.9 63.684,87.766 69.692,87.766 69.953,87.504 69.95,87.501 69.959,87.492 69.966,87.492 v1(69.978,87.504)
  Bottom Layer w0.203: v1@69.95,87.293 69.95,87.49 69.964,87.504 v1(69.978,87.504) 69.978,87.464 U10.49@71.701,85.742
SRAM_ADDR14: U7.232 U10.50 | length 10.9
  Top Layer w0.203: U7.232@64.05,91.7 64.05,89.75 65.631,88.169 70.242,88.169 71.057,87.354 v1(71.103,87.354)
  Bottom Layer w0.203: v1(71.103,87.354) 71.631,86.827 U10.50@71.631,86.636
SRAM_ADDR15: U7.118 U10.81 | length 14.5
  Top Layer w0.203: v1(87.329,63.128) 87.329,61.742 88.55,60.522 U7.118@88.55,57.9
  Bottom Layer w0.254: U10.81@86.657,71.61 87.336,70.931 87.336,63.135 v1(87.329,63.128)
SRAM_ADDR16: U7.117 U10.82 | length 14.2
  Top Layer w0.203: v1(86.654,63.878) 86.661,63.872 86.661,61.784 88.05,60.395 U7.117@88.05,57.9
  Bottom Layer w0.254: U10.82@86.197,71.151 86.197,71.089 86.848,70.438 86.848,64.072 v1(86.654,63.878)
SRAM_ADDR17: U7.107 U10.99 | length 8.5
  Top Layer w0.203: v1(80.325,62.75) 80.964,62.75 83.05,60.664 U7.107@83.05,57.9
  Bottom Layer w0.203: U10.99@78.383,63.337 78.971,62.75 v1(80.325,62.75)
SRAM_ADDR18: U7.106 U10.100 | length 8.3
  Top Layer w0.203: v1(79.629,62.078) 81.066,62.078 82.55,60.594 U7.106@82.55,57.9
  Bottom Layer w0.203: U10.100@77.924,62.878 78.723,62.078 v1(79.629,62.078)
SRAM_ADSC_N: U7.112 U10.85 | length 12.9
  Top Layer w0.203: v1(84.679,63.153) 84.679,61.937 85.55,61.066 U7.112@85.55,57.9
  Bottom Layer w0.254: v1(84.679,63.153) 84.572,63.26 84.572,64.157 84.572,64.597 85.4,65.425 85.4,69.19 U10.85@84.818,69.772
SRAM_ADSP_N: U7.113 U10.84 | length 13.2
  Top Layer w0.203: v1(85.254,63.928) 85.4,63.782 85.4,63.603 85.348,63.551 85.348,61.927 86.05,61.225 U7.113@86.05,57.9
  Bottom Layer w0.254: v1(85.254,63.928) 85.254,64.5 85.9,65.146 85.9,69.609 U10.84@85.278,70.232
SRAM_ADV_N: U7.114 U10.83 | length 13.5
  Top Layer w0.203: v1(86.004,63.203) 86.004,61.871 86.55,61.325 86.55,59.628 86.543,59.622 86.543,57.907 U7.114@86.55,57.9
  Bottom Layer w0.254: U10.83@85.737,70.691 86.394,70.035 86.394,64.822 85.972,64.4 85.972,63.235 v1(86.004,63.203)
SRAM_BWE_N: U7.110 U10.87 | length 12.3
  Top Layer w0.203: v1(83.35,63.075) 83.35,62.127 84.502,60.975 84.502,57.948 U7.110@84.55,57.9
  Bottom Layer w0.254: v1(83.35,63.075) 83.208,63.217 83.208,65.208 84.455,66.455 84.455,68.297 U10.87@83.899,68.853
SRAM_CE2_N: R46.1 U7.84 U10.92 | length 6.4
  Top Layer w0.203: R46.1@71.5,52.95 71.393,53.057 71.393,55.122 71.55,55.278 U7.84@71.55,57.9
  Bottom Layer w0.203: v1(80.625,67.53) U10.92@81.601,66.555
SRAM_CE_N: R45.2 U7.83 U10.98 | length 7.1
  Top Layer w0.203: R45.2@70.3,52.95 70.3,54.598 71.05,55.348 U7.83@71.05,57.9 ; v1@77.6,65.099 v1(77.629,65.128)
  Bottom Layer w0.203: v1(77.629,65.128) 77.629,65.056 78.843,63.842 U10.98@78.843,63.797
SRAM_CLK: U7.69 U10.89 | length 28.2
  Top Layer w0.203: U7.69@64.05,57.9 64.099,57.949 64.099,58.806 69,63.707 69,68.3 71,70.3 80.613,70.3 v1(82.121,68.792)
  Bottom Layer w0.203: v1(82.121,68.792) U10.89@82.98,67.934
SRAM_DQ0: U7.226 U10.52 | length 11.9
  Top Layer w0.203: U7.226@67.05,91.7 67.05,89.65 67.725,88.975 71.303,88.975 73.18,87.098 v1(73.18,85.57)
  Bottom Layer w0.203: v1(73.18,85.57) U10.52@73.964,86.354
SRAM_DQ1: U7.221 U10.53 | length 10.6
  Top Layer w0.203: U7.221@69.55,91.7 69.55,90.811 69.66,90.701 69.66,90.39 70.467,89.583 71.272,89.583 73.211,87.644 75.289,87.644 v1(75.754,87.179)
  Bottom Layer w0.203: U10.53@74.424,85.894 74.469,85.894 v1@75.754,87.179
SRAM_DQ2: U7.219 U10.56 | length 12.1
  Top Layer w0.203: U7.219@70.55,91.7 70.55,90.375 70.875,90.05 71.375,90.05 73.378,88.047 75.85,88.047 76.687,87.21 76.687,85.4 76.608,85.479 v1(76.604,85.479)
  Bottom Layer w0.203: U10.56@75.757,84.515 U10.56@75.802,84.515 76.687,85.4 76.608,85.479 v1(76.604,85.479)
SRAM_DQ3: U7.217 U10.57 | length 12
  Top Layer w0.203: U7.217@71.55,91.7 71.55,90.556 73.656,88.45 76.125,88.45 77.35,87.225 v1(77.35,86.175)
  Bottom Layer w0.203: U10.57@76.262,84.056 76.307,84.056 76.847,84.595 76.847,84.737 77.369,85.259 77.369,85.682 77.35,85.702 v1(77.35,86.175)
SRAM_DQ4: U7.202 U10.58 | length 9.5
  Top Layer w0.203: v1@77.425,84.325 77.541,84.325 77.596,84.38 77.529,84.447 v1(77.529,84.454) ; v1@77.538,84.438 77.538,84.457 78.238,85.157 78.257,85.157 79.05,85.95 U7.202@79.05,91.7
  Bottom Layer w0.203: U10.58@76.722,83.596 77.505,84.38 77.596,84.38 77.529,84.447 v1(77.529,84.454)
SRAM_DQ5: U7.201 U10.59 | length 9.6
  Top Layer w0.203: v1(78.52,84.475) v1@78.525,84.475 ; v1@78.59,84.41 79.55,85.369 U7.201@79.55,91.7
  Bottom Layer w0.203: U10.59@77.181,83.136 v1(78.52,84.475)
SRAM_DQ6: U7.197 U10.62 | length 10
  Top Layer w0.203: v1(79.378,82.575) 79.378,82.584 81.502,84.708 81.502,91.652 U7.197@81.55,91.7
SRAM_DQ7: U7.194 U10.63 | length 15.9
  Top Layer w0.203: v1(80.347,82.625) 83.027,85.305 ; v1@80.356,82.625 83.027,85.296 83.027,85.305 ; U7.194@83.05,91.7 83.027,91.677 83.027,85.305
  Bottom Layer w0.203: U10.63@79.02,81.298 79.029,81.298 80.347,82.616 v1(80.347,82.625)
SRAM_DQ8: U7.171 U10.68 | length 13
  Top Layer w0.203: v1(82.168,79.85) 87.528,85.209 89.094,85.209 89.253,85.05 U7.171@91.7,85.05
  Bottom Layer w0.203: U10.68@81.318,79 v1(82.168,79.85)
SRAM_DQ9: U7.137 U10.69 | length 19.1
  Top Layer w0.203: v1(83.3,80.05) 84.875,80.05 87.85,77.075 87.85,71.043 88.321,70.571 90.794,68.099 91.652,68.099 U7.137@91.7,68.05
  Bottom Layer w0.203: U10.69@81.778,78.54 81.787,78.54 83.3,80.053 v1(83.3,80.05)
SRAM_DQ10: U7.135 U10.72 | length 18.3
  Top Layer w0.203: v1(83.954,77.954) 84.775,78.775 85.403,78.775 87.447,76.731 87.447,69.45 89.847,67.05 U7.135@91.7,67.05
  Bottom Layer w0.254: U10.72@83.156,77.161 83.162,77.161 v1(83.954,77.954)
SRAM_DQ11: U7.134 U10.73 | length 17.5
  Top Layer w0.203: v1(85.2,78.05) 85.2,77.725 87.044,75.881 87.044,69.283 89.777,66.55 U7.134@91.7,66.55
  Bottom Layer w0.203: U10.73@83.616,76.702 83.63,76.702 84.611,77.682 84.611,77.696 84.864,77.95 85.1,77.95 v1(85.2,78.05)
SRAM_DQ12: U7.132 U10.74 | length 16.8
  Top Layer w0.203: v1(84.883,77.026) 84.879,77.029 84.879,77.071 86.35,75.6 86.35,68.77 89.56,65.56 91.691,65.56 U7.132@91.7,65.55
  Bottom Layer w0.203: U10.74@84.076,76.315 U10.74@84.076,76.242 84.862,77.029 84.88,77.029 v1(84.883,77.026)
SRAM_DQ13: U7.131 U10.75 | length 16.2
  Top Layer w0.203: v1(83.752,74.999) 84.671,74.999 85.947,73.722 85.947,68.603 89.393,65.157 90.547,65.157 90.653,65.05 U7.131@91.7,65.05
  Bottom Layer w0.203: v1(83.752,74.999) U10.75@84.535,75.782
SRAM_DQ14: U7.127 U10.78 | length 15.2
  Top Layer w0.203: v1(85.121,73.62) 85.475,73.266 85.475,68.25 90.675,63.05 U7.127@91.7,63.05
  Bottom Layer w0.203: v1(85.121,73.62) 85.13,73.62 U10.78@85.914,74.404 U10.78@86.074,74.404
SRAM_DQ15: U7.126 U10.79 | length 15.6
  Top Layer w0.203: v1(84.775,72.345) 84.775,68.361 90.586,62.55 U7.126@91.7,62.55
  Bottom Layer w0.203: v1(84.775,72.345) U10.79@86.374,73.944
SRAM_DQ16: U7.98 U10.2 | length 7.5
  Top Layer w0.203: v1(74.807,62.368) 75.842,61.332 76.471,61.332 78.55,59.253 U7.98@78.55,57.9
  Bottom Layer w0.203: v1(74.807,62.368) 74.807,62.377 U10.2@75.59,63.161
SRAM_DQ17: U7.94 U10.3 | length 7.5
  Top Layer w0.203: v1(73.896,62.586) 73.879,62.603 73.876,62.6 73.876,61.999 76.55,59.325 U7.94@76.55,57.9
  Bottom Layer w0.203: v1(73.896,62.586) 73.879,62.603 74.114,62.603 U10.3@75.131,63.62
SRAM_DQ18: U7.93 U10.6 | length 8.9
  Top Layer w0.203: v1(72.904,64.153) 72.954,64.203 72.997,64.203 72.997,62.128 76.05,59.075 U7.93@76.05,57.9
  Bottom Layer w0.203: v1(72.904,64.153) 72.954,64.203 72.956,64.203 U10.6@73.752,64.999
SRAM_DQ19: U7.88 U10.7 | length 9.2
  Top Layer w0.203: v1(71.579,63.753) 71.654,63.753 71.575,63.675 71.575,61.62 73.55,59.645 U7.88@73.55,57.9
  Bottom Layer w0.203: v1(71.579,63.753) 71.579,63.757 73.281,65.459 U10.7@73.292,65.459
SRAM_DQ20: U7.87 U10.8 | length 9.7
  Top Layer w0.203: v1(72.025,65.132) 72.029,65.128 71.31,64.41 71.307,64.41 70.922,64.025 70.922,61.703 73.05,59.575 U7.87@73.05,57.9
  Bottom Layer w0.203: v1(72.025,65.132) 72.029,65.128 72.043,65.128 U10.8@72.833,65.918
SRAM_DQ21: U7.82 U10.9 | length 9.3
  Top Layer w0.203: U7.82@70.55,57.9 70.519,57.931 70.519,64.524 70.728,64.733 v1(70.728,64.778)
  Bottom Layer w0.203: v1(70.728,64.778) v1(70.728,64.778) 70.75,64.755 70.75,64.785 72.343,66.378 U10.9@72.373,66.378
SRAM_DQ22: U7.81 U10.12 | length 10.1
  Top Layer w0.203: U7.81@70.05,57.9 v1@70.05,66.75 ; v1(70.203,66.953) v1@70.203,67.053
  Bottom Layer w0.203: v1(70.203,66.953) 70.203,66.966 U10.12@70.994,67.757
SRAM_DQ23: U7.57 U10.13 | length 15.5
  Top Layer w0.203: U7.57@57.9,61.55 59.322,61.55 59.428,61.657 59.972,61.657 60.078,61.55 63.868,61.55 v1(64.934,62.616)
  Bottom Layer w0.203: v1(64.934,62.616) U10.13@70.535,68.216
SRAM_DQ24: U7.52 U10.18 | length 13.2
  Top Layer w0.203: U7.52@57.9,64.05 62.15,64.05 v1(67.4,69.3)
  Bottom Layer w0.203: v1(67.4,69.3) 67.4,69.482 68.236,70.319 U10.18@68.236,70.514
SRAM_DQ25: U7.51 U10.19 | length 12.7
  Top Layer w0.203: U7.51@57.9,64.55 61.353,64.55 66.403,69.6 66.453,69.55 v1(66.453,69.528)
  Bottom Layer w0.203: v1(66.453,69.528) 66.403,69.579 66.403,69.631 67.745,70.974 U10.19@67.777,70.974
SRAM_DQ26: U7.49 U10.22 | length 11.9
  Top Layer w0.203: U7.49@57.9,65.55 60.619,65.55 65.15,70.081 v1(65.15,70.95)
  Bottom Layer w0.203: v1(65.15,70.95) 65.15,71.025 66.398,72.273 U10.22@66.398,72.353
SRAM_DQ27: U7.45 U10.23 | length 9.6
  Top Layer w0.203: U7.45@57.9,67.55 60.753,67.55 65.155,71.952 65.155,71.773 65.053,71.875 v1(65.053,71.879) ; v1@65.155,72.02 v1@65.155,72.18
SRAM_DQ28: U7.43 U10.24 | length 9.6
  Top Layer w0.203: U7.43@57.9,68.55 60.825,68.55 v1(63.987,71.713)
  Bottom Layer w0.203: v1(63.987,71.713) 63.987,71.781 65.163,72.957 65.231,72.957 65.479,73.204 U10.24@65.479,73.272
SRAM_DQ29: U7.41 U10.25 | length 9.2
  Top Layer w0.203: U7.41@57.9,69.55 60.9,69.55 63.331,71.981 63.331,71.985 64.226,72.88 64.226,72.948 64.107,72.829 v1(64.103,72.829)
  Bottom Layer w0.203: v1(64.103,72.829) 64.223,72.948 64.235,72.948 U10.25@65.019,73.732
SRAM_DQ30: U7.38 U10.28 | length 7.5
  Top Layer w0.203: U7.38@57.9,71.05 59.589,71.05 62.768,74.229 62.768,74.318 v1(62.857,74.318)
  Bottom Layer w0.203: v1(62.857,74.318) 62.857,74.327 U10.28@63.64,75.111
SRAM_DQ31: U7.37 U10.29 | length 7.1
  Top Layer w0.203: U7.37@57.9,71.55 59.403,71.55 61.61,73.758 v1(61.61,74)
  Bottom Layer w0.203: v1(61.61,74) U10.29@63.181,75.57
SRAM_MODE: R48.1 U7.68 U10.31 | length 29.5
  Top Layer w0.203: U7.68@63.55,57.9 63.55,58.827 68.1,63.377 68.1,73.45 v1(67.275,74.275)
  Top Layer w0.254: U7.68@63.55,57.9 63.55,56.914 63.682,56.782 63.682,53.032 R48.1@63.6,52.95
  Bottom Layer w0.203: U10.31@62.898,77.904 63.094,77.904 66.722,74.275 v1(67.275,74.275)
SRAM_OE_N: R44.2 U7.111 U10.86 | length 17.5
  Top Layer w0.203: v1(83.89,63.875) 83.9,63.875 84.025,63.75 84.025,63.528 84.023,63.526 84.023,62.024 85.05,60.996 85.05,58.1 85.099,58.051 85.099,52.951 R44.2@85.1,52.95
  Bottom Layer w0.254: v1(83.89,63.875) 83.89,64.99 84.914,66.014 84.914,68.757 U10.86@84.359,69.312
SRAM_PAR0: U7.231 U10.51 | length 12
  Top Layer w0.203: U7.231@64.55,91.7 64.55,89.925 65.903,88.572 70.814,88.572 72.3,87.086 v1(72.3,87.05)
  Bottom Layer w0.203: v1(72.3,87.05) 73.268,87.05 U10.51@73.504,86.813
SRAM_PAR1: U7.103 U10.80 | length 20
  Top Layer w0.203: U7.103@81.05,57.9 81.05,59.403 78.85,61.603 78.85,63.65 83.104,67.904 v1(83.104,70.053)
  Bottom Layer w0.203: v1(83.104,70.053) 83.412,70.053 86.833,73.475 U10.80@86.833,73.484
SRAM_PAR2: U7.100 U10.1 | length 6.5
  Top Layer w0.203: v1(76.904,62.278) 79.55,59.632 79.55,59.603 79.543,59.597 79.543,57.907 U7.100@79.55,57.9
  Bottom Layer w0.203: U10.1@76.05,62.701 76.473,62.278 v1(76.904,62.278)
SRAM_PAR3: U7.92 U10.30 | length 26
  Top Layer w0.203: v1(72.425,69.35) 72.682,69.093 72.682,64.86 72.247,64.425 72.247,62.303 75.55,59 U7.92@75.55,57.9
  Bottom Layer w0.203: U10.30@62.721,76.03 63.251,76.56 63.867,76.56 66.903,73.525 68.25,73.525 v1(72.425,69.35)
SRAM_ZZ: R47.1 U7.189 U10.64 | length 18.5
  Top Layer w0.203: v1(80.404,81.704) 85.55,86.85 U7.189@85.55,91.7 85.55,94.347 85.707,94.503 85.707,96.543 R47.1@85.6,96.65
  Bottom Layer w0.203: U10.64@79.479,80.838 80.345,81.704 v1(80.404,81.704)
UART_RXD: U3.5 U7.95
UART_TXD: U3.1 U7.99
VGA1_AB: J1.3 R6.1 U1.28
VGA1_AG: J1.2 R5.1 U1.32
VGA1_AR: J1.1 R4.2 U1.34
VGA1_B0: U2.99 U7.162
VGA1_B1: U2.98 U7.164
VGA1_B2: U2.88 U7.177
VGA1_B3: U2.87 U7.183
VGA1_B4: U2.92 U7.166
VGA1_B5: U2.91 U7.169
VGA1_B6: U2.90 U7.173
VGA1_B7: U2.89 U7.176
VGA1_CS_N: U2.123 U7.196
VGA1_DC_N: U2.122 U7.128
VGA1_E_N: U2.121 U7.133
VGA1_G0: U2.113 U7.145
VGA1_G1: U2.112 U7.146
VGA1_G2: U2.111 U7.149
VGA1_G3: U2.107 U7.150
VGA1_G4: U2.106 U7.151
VGA1_G5: U2.105 U7.159
VGA1_G6: U2.104 U7.160
VGA1_G7: U2.103 U7.161
VGA1_HSYNC: R2.2 U2.44
VGA1_PIXEL_CLK: U2.38 U7.209
VGA1_R0: U2.7 U7.188
VGA1_R1: U2.8 U7.187
VGA1_R2: U2.9 U7.186
VGA1_R3: U2.10 U7.185
VGA1_R4: U2.11 U7.184
VGA1_R5: U2.116 U7.142
VGA1_R6: U2.115 U7.143
VGA1_R7: U2.114 U7.144
VGA1_RESET_N: U2.127 U7.195
VGA1_RW_N: U2.120 U7.139
VGA1_TE: U2.50 U7.200
VGA1_VSYNC: R3.2 U2.43
VGA2_B: R11.2 U7.80
VGA2_G: R10.2 U7.78
VGA2_HSYNC: R12.2 U7.73
VGA2_R: R9.2 U7.76
VGA2_VSYNC: R13.2 U7.63
pads on no net: J1.4 J1.9 J1.11 J1.12 J1.15 J3.4 J3.9 J3.11 J3.12 J3.15 J4.2 J4.6 J7.0 U2.24 U2.39 U2.49 U2.51 U2.52 U2.53 U3.2 U3.3 U3.6 U3.8 U3.9 U3.10 U3.11 U3.12 U3.13 U3.14 U3.19 U3.24 U3.27 U3.28 U4.5 U5.9 U5.12 U5.20 U6.9 U6.12 U6.20 U7.65 U7.70 U7.109 U8.6 U8.7 U8.8 U9.3 U9.4 U9.5 U9.6 U9.11 U9.12 U9.13 U9.14 U10.14 U10.16 U10.38 U10.39 U10.66 X1.1

## Polygon pours and split planes (outlines as drawn)
GND on Bottom Layer "Top Layer-No Net" (solid, pour order 12): 76.85,63.65 76.85,63.725 85.875,72.75 72.7,85.925 72.675,85.925 63.65,76.9 63.625,76.9

## Other copper
Top Layer:
  region net GND: 116.856,100.594 107.056,100.594 107.056,90.794 116.856,90.794

## Text inside footprints (layer, text, board x,y; h text height)
J5: Top Overlay "1" at 269.515,325.968 h1.27 r90; Top Overlay "1" at 266.467,324.952 h1.27 r90; Top Overlay "1" at 266.467,325.968 h1.27 r90; Top Overlay "10" at 269.007,352.384 h1.27 r90; Top Overlay "20" at 266.467,352.384 h1.27 r90